# EAGLE board 549-teletouch-sensor (EAGLE 8.0.0)
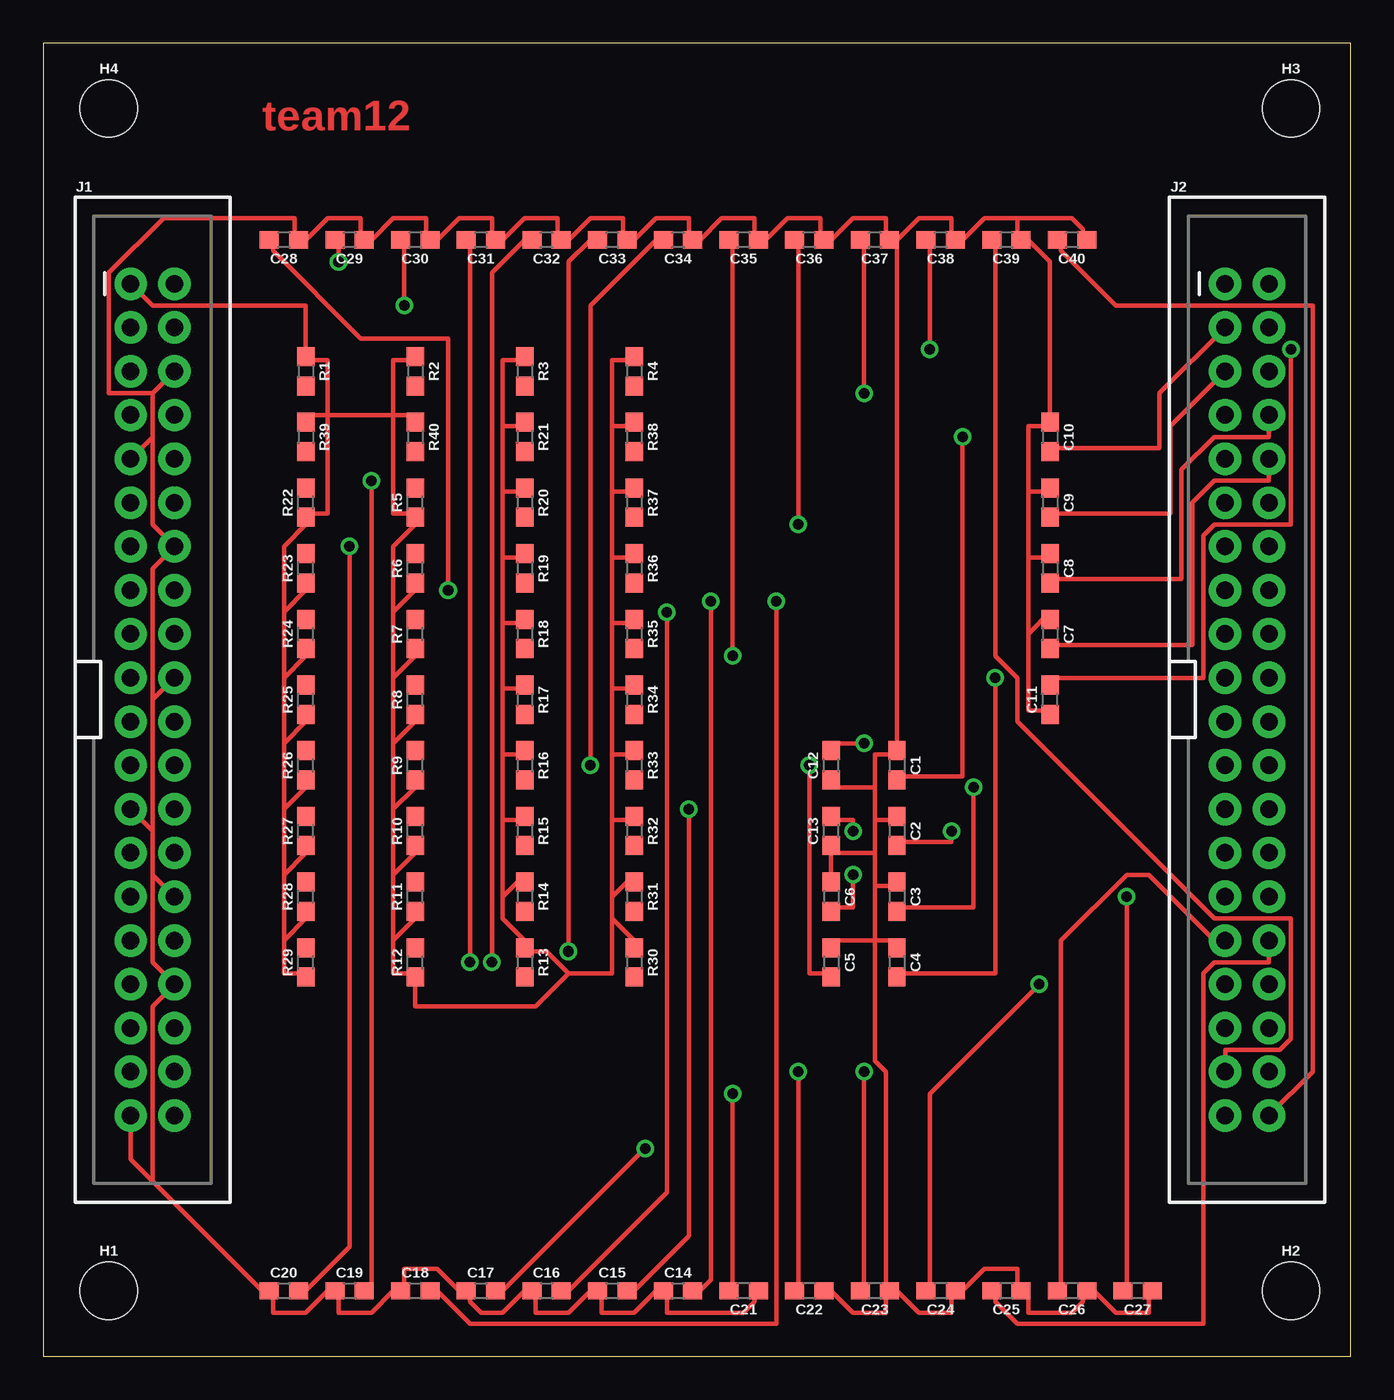
[diagram p0: board, top side]
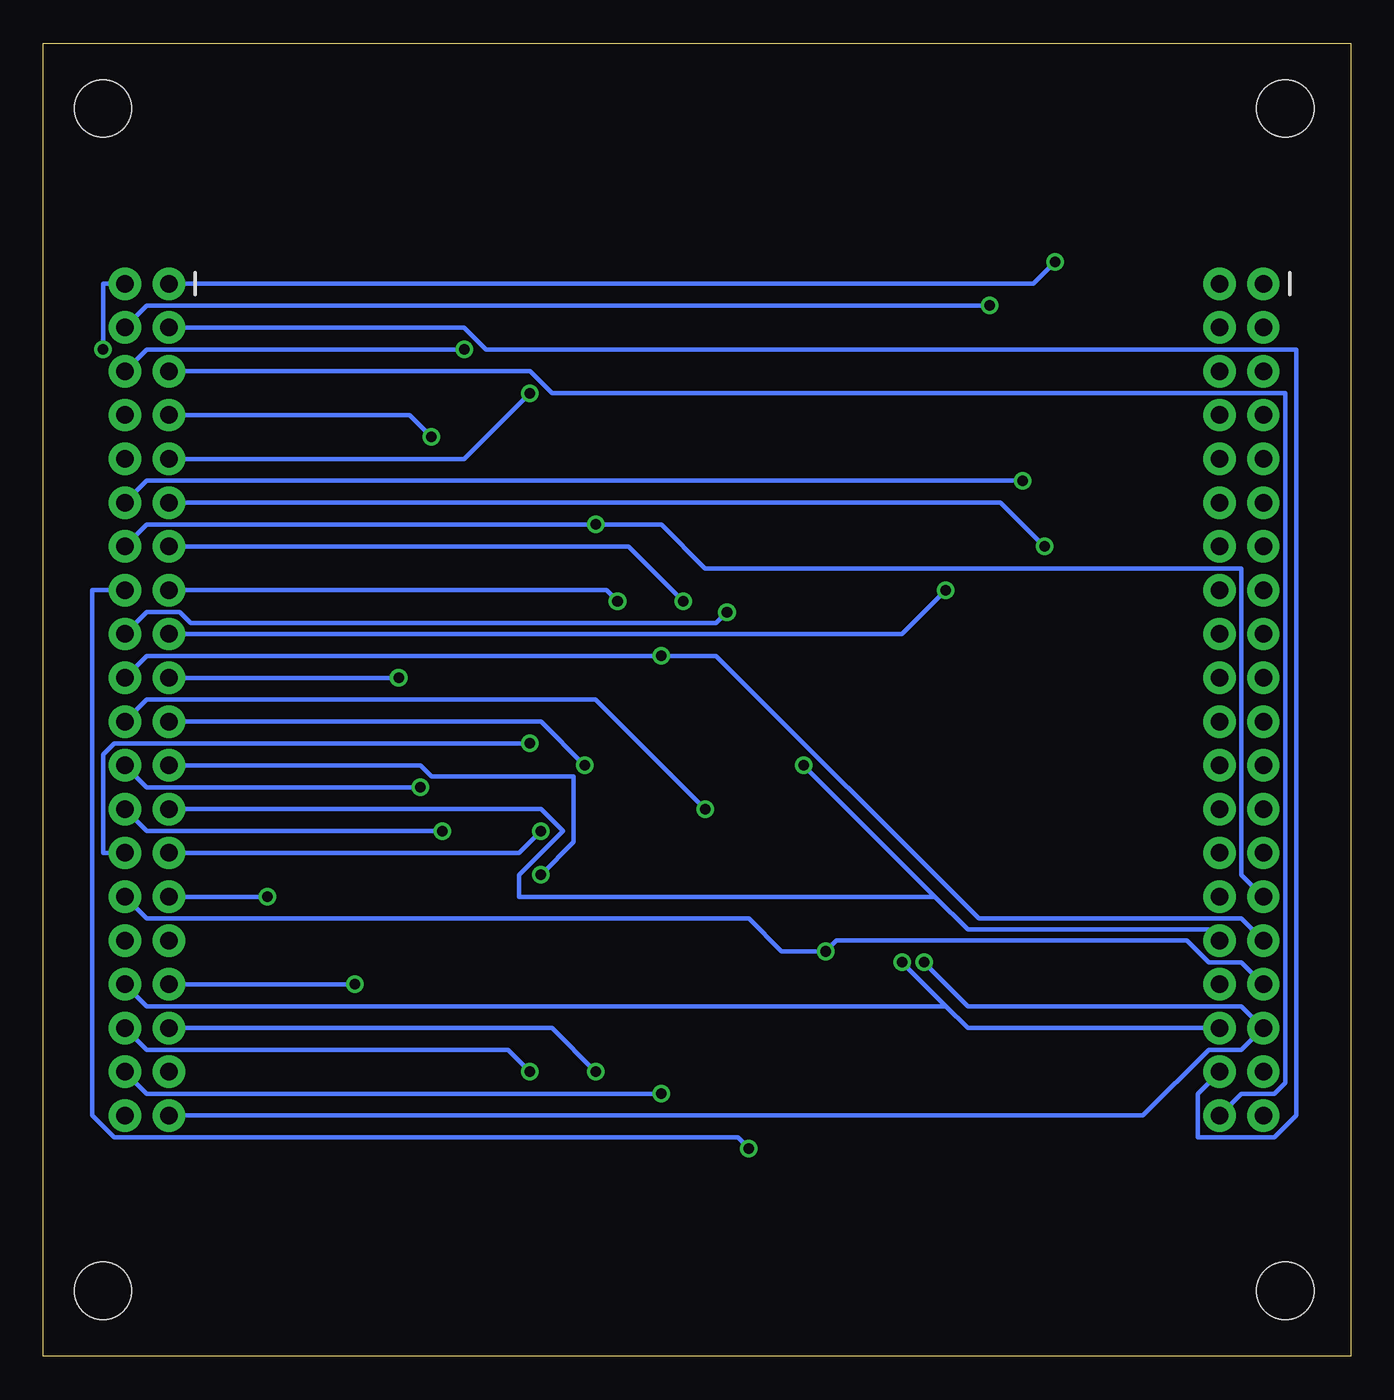
[diagram p1: board, bottom side, seen from below]

Size 75.87 x 76.19 mm. Coordinates in mm from the lower left corner, seen from the top.
Outline: 0,0 75.87,0 75.87,76.19 0,76.19 0,0
Copper layers (1*16): Top 0.035mm / dielectric 1.5mm / Bottom 0.035mm
Design rules "default": minimum track width 10mil, minimum drill 24mil, track to track 8mil, track to pad 8mil, pad to pad 8mil, via to via 8mil, smd to smd 8mil, copper to edge 40mil, drill to drill 8mil, minimum pad ring 10mil, minimum via ring 8mil, stop-mask expansion 4mil, vias tented up to drill 0mil, thermal gap 10mil

## Footprints (pad centres in the part's own frame; a part is rotated, then mirrored left to right if it is on the bottom)
0603 = smd 1.1 x 1: 1 -0.85,0; 2 0.85,0
STAND-OFF = hole 3.302: 0,0
2X20_SHROUDED = drill 1.016 pad 1.88: 1 -1.27,24.13; 2 1.27,24.13; 3 -1.27,21.59; 4 1.27,21.59; 5 -1.27,19.05; 6 1.27,19.05; 7 -1.27,16.51; 8 1.27,16.51; 9 -1.27,13.97; 10 1.27,13.97; 11 -1.27,11.43; 12 1.27,11.43; 13 -1.27,8.89; 14 1.27,8.89; 15 -1.27,6.35; 16 1.27,6.35; 17 -1.27,3.81; 18 1.27,3.81; 19 -1.27,1.27; 20 1.27,1.27; 21 -1.27,-1.27; 22 1.27,-1.27; 23 -1.27,-3.81; 24 1.27,-3.81; 25 -1.27,-6.35; 26 1.27,-6.35; 27 -1.27,-8.89; 28 1.27,-8.89; 29 -1.27,-11.43; 30 1.27,-11.43; 31 -1.27,-13.97; 32 1.27,-13.97; 33 -1.27,-16.51; 34 1.27,-16.51; 35 -1.27,-19.05; 36 1.27,-19.05; 37 -1.27,-21.59; 38 1.27,-21.59; 39 -1.27,-24.13; 40 1.27,-24.13

## Placement (x,y rotation side)
C1  47nF  [0603]  49.53,34.29 270 top
C2  47nF  [0603]  49.53,30.48 270 top
C3  47nF  [0603]  49.53,26.67 270 top
C4  47nF  [0603]  49.53,22.86 270 top
C5  47nF  [0603]  45.72,22.86 270 top
C6  47nF  [0603]  45.72,26.67 270 top
C7  47nF  [0603]  58.42,41.91 270 top
C8  47nF  [0603]  58.42,45.72 270 top
C9  47nF  [0603]  58.42,49.53 270 top
C10  47nF  [0603]  58.42,53.34 270 top
C11  47nF  [0603]  58.42,38.1 90 top
C12  47nF  [0603]  45.72,34.29 90 top
C13  47nF  [0603]  45.72,30.48 90 top
C14  47nF  [0603]  36.83,3.81 0 top
C15  47nF  [0603]  33.02,3.81 0 top
C16  47nF  [0603]  29.21,3.81 0 top
C17  47nF  [0603]  25.4,3.81 0 top
C18  47nF  [0603]  21.59,3.81 0 top
C19  47nF  [0603]  17.78,3.81 0 top
C20  47nF  [0603]  13.97,3.81 0 top
C21  47nF  [0603]  40.64,3.81 180 top
C22  47nF  [0603]  44.45,3.81 180 top
C23  47nF  [0603]  48.26,3.81 180 top
C24  47nF  [0603]  52.07,3.81 180 top
C25  47nF  [0603]  55.88,3.81 180 top
C26  47nF  [0603]  59.69,3.81 180 top
C27  47nF  [0603]  63.5,3.81 180 top
C28  47nF  [0603]  13.97,64.77 180 top
C29  47nF  [0603]  17.78,64.77 180 top
C30  47nF  [0603]  21.59,64.77 180 top
C31  47nF  [0603]  25.4,64.77 180 top
C32  47nF  [0603]  29.21,64.77 180 top
C33  47nF  [0603]  33.02,64.77 180 top
C34  47nF  [0603]  36.83,64.77 180 top
C35  47nF  [0603]  40.64,64.77 180 top
C36  47nF  [0603]  44.45,64.77 180 top
C37  47nF  [0603]  48.26,64.77 180 top
C38  47nF  [0603]  52.07,64.77 180 top
C39  47nF  [0603]  55.88,64.77 180 top
C40  47nF  [0603]  59.69,64.77 180 top
FRAME1  FRAME-LETTER  [CREATIVE_COMMONS]  -101.6,63.5 0 top  (outside the outline)
H1  STAND-OFF  [STAND-OFF]  3.81,3.81 0 top
H2  STAND-OFF  [STAND-OFF]  72.39,3.81 0 top
H3  STAND-OFF  [STAND-OFF]  72.39,72.39 0 top
H4  STAND-OFF  [STAND-OFF]  3.81,72.39 0 top
J1  RASPBERRYPI-40-PIN-GPIO_PTH  [2X20_SHROUDED]  6.35,38.1 0 top
J2  RASPBERRYPI-40-PIN-GPIO_PTH  [2X20_SHROUDED]  69.85,38.1 0 top
R1  2.2k  [0603]  15.24,57.15 270 top
R2  2.2k  [0603]  21.59,57.15 270 top
R3  2.2k  [0603]  27.94,57.15 270 top
R4  2.2k  [0603]  34.29,57.15 270 top
R5  2.2k  [0603]  21.59,49.53 90 top
R6  2.2k  [0603]  21.59,45.72 90 top
R7  2.2k  [0603]  21.59,41.91 90 top
R8  2.2k  [0603]  21.59,38.1 90 top
R9  2.2k  [0603]  21.59,34.29 90 top
R10  2.2k  [0603]  21.59,30.48 90 top
R11  2.2k  [0603]  21.59,26.67 90 top
R12  2.2k  [0603]  21.59,22.86 90 top
R13  2.2k  [0603]  27.94,22.86 270 top
R14  2.2k  [0603]  27.94,26.67 270 top
R15  2.2k  [0603]  27.94,30.48 270 top
R16  2.2k  [0603]  27.94,34.29 270 top
R17  2.2k  [0603]  27.94,38.1 270 top
R18  2.2k  [0603]  27.94,41.91 270 top
R19  2.2k  [0603]  27.94,45.72 270 top
R20  2.2k  [0603]  27.94,49.53 270 top
R21  2.2k  [0603]  27.94,53.34 270 top
R22  2.2k  [0603]  15.24,49.53 90 top
R23  2.2k  [0603]  15.24,45.72 90 top
R24  2.2k  [0603]  15.24,41.91 90 top
R25  2.2k  [0603]  15.24,38.1 90 top
R26  2.2k  [0603]  15.24,34.29 90 top
R27  2.2k  [0603]  15.24,30.48 90 top
R28  2.2k  [0603]  15.24,26.67 90 top
R29  2.2k  [0603]  15.24,22.86 90 top
R30  2.2k  [0603]  34.29,22.86 270 top
R31  2.2k  [0603]  34.29,26.67 270 top
R32  2.2k  [0603]  34.29,30.48 270 top
R33  2.2k  [0603]  34.29,34.29 270 top
R34  2.2k  [0603]  34.29,38.1 270 top
R35  2.2k  [0603]  34.29,41.91 270 top
R36  2.2k  [0603]  34.29,45.72 270 top
R37  2.2k  [0603]  34.29,49.53 270 top
R38  2.2k  [0603]  34.29,53.34 270 top
R39  2.2k  [0603]  15.24,53.34 270 top
R40  2.2k  [0603]  21.59,53.34 270 top

## Library data of the parts
C1-C40 = SparkFun-Capacitors; PROD_ID: CAP-08605
FRAME1 = SparkFun-Aesthetics
H1-H4 = SparkFun-Hardware
J1 J2 = SparkFun-Connectors; PROD_ID: CONN-12263; SF_ID: PRT-13054
R1-R40 = SparkFun-Resistors; PROD_ID: RES-08272

## Nets
3.3V: J1.17
5V: J1.4
GND: C1.1 C2.1 C3.1 C4.1 C5.1 C6.1 C7.1 C8.1 C9.1 C10.1 C11.1 C12.1 C13.1 C14.1 C15.1 C16.1 C17.1 C18.1 C19.1 C20.1 C21.1 C22.1 C23.1 C24.1 C25.1 C26.1 C27.1 C28.1 C29.1 C30.1 C31.1 C32.1 C33.1 C34.1 C35.1 C36.1 C37.1 C38.1 C39.1 C40.1 J1.6 J1.9 J1.14 J1.20 J1.25 J1.30 J1.34 J1.39
GP1: C8.2 J2.8
GP2: C7.2 J2.10
GP3: C6.2 J2.23
GP4: C5.2 J2.21
GP5: C4.2 J2.19
GP6: C3.2 J2.24
GP7: C2.2 J2.26
GP8: C1.2 J2.7
GP9: C20.2 J2.11
GP10: C19.2 J2.12
GP11: C18.2 J2.15
GP12: C17.2 J2.16
GP13: C16.2 J2.18
GP14: C15.2 J2.22
GP15: C14.2 J2.13
GP16: C13.2 J2.27
GP17: C12.2 J2.28
GP18: C11.2 J2.2
GP19: C30.2 J2.4
GP20: C29.2 J2.1
GP21: C28.2 J2.17
GP22: C27.2 J2.29
GP23: C26.2 J2.31
GP24: C25.2 J2.32
GP25: C24.2 J2.33
GP26: C23.2 J2.36
GP27: C22.2 J2.35
GP28: C21.2 J2.38
GP29: C40.2 J2.40
GP30: C39.2 J2.37
GP31: C38.2 J2.6
GP32: C37.2 J2.9
GP33: C36.2 J1.29 J2.14
GP34: C35.2 J1.31 J2.20
GP35: C34.2 J1.32 J2.25
GP36: C33.2 J1.33 J2.30
GP37: C32.2 J1.36 J2.34
GP38: C31.2 J1.35 J2.39
GP39: C10.2 J1.38 J2.3
GP40: C9.2 J1.40 J2.5
GP41: J1.37
GP42: J1.7
GP43: J1.11
GP44: J1.12
GP45: J1.15
GP46: J1.16
GP47: J1.18
GP48: J1.22
GP49: J1.13
N$11: R10.2
N$12: R1.2
N$13: R2.2
N$14: R3.2
N$15: R4.2
N$16: R5.2
N$17: R6.2
N$18: R7.2
N$19: R8.2
N$20: R9.2
N$31: R20.2
N$32: R11.2
N$33: R12.2
N$34: R13.2
N$35: R14.2
N$36: R15.2
N$37: R16.2
N$38: R17.2
N$39: R18.2
N$40: R19.2
N$51: R30.2
N$52: R21.2
N$53: R22.2
N$54: R23.2
N$55: R24.2
N$56: R25.2
N$57: R26.2
N$58: R27.2
N$59: R28.2
N$60: R29.2
N$71: R40.2
N$72: R31.2
N$73: R32.2
N$74: R33.2
N$75: R34.2
N$76: R35.2
N$77: R36.2
N$78: R37.2
N$79: R38.2
N$80: R39.2
SCL: J1.5
SDA: J1.3
VCC: J1.1 R1.1 R2.1 R3.1 R4.1 R5.1 R6.1 R7.1 R8.1 R9.1 R10.1 R11.1 R12.1 R13.1 R14.1 R15.1 R16.1 R17.1 R18.1 R19.1 R20.1 R21.1 R22.1 R23.1 R24.1 R25.1 R26.1 R27.1 R28.1 R29.1 R30.1 R31.1 R32.1 R33.1 R34.1 R35.1 R36.1 R37.1 R38.1 R39.1 R40.1
VDD: J1.2

## Tracks (layer width: path | path; a pad name or v marks a point on that pad's centre or on a via)
GND
  Top 0.254: 6.35,53.34 J1.9 | 6.35,55.88 6.35,53.34 | J1.6 6.35,55.88 | 6.35,53.34 6.35,48.26 J1.14 6.35,45.72 6.35,38.1 | 6.35,30.48 J1.25 | 6.35,27.94 6.35,30.48 | J1.30 6.35,27.94 | 6.35,27.94 6.35,22.86 J1.34 6.35,20.32 6.35,10.16 | 6.35,38.1 J1.20 | 6.35,30.48 6.35,38.1 | 6.35,10.16 5.08,11.43 J1.39 | 6.35,10.16 12.7,3.81 C20.1 13.34,3.81 13.34,2.54 15.24,2.54 16.51,3.81 C19.1 17.14,3.81 17.14,2.54 19.05,2.54 20.32,3.81 C18.1 20.95,3.81 20.95,5.08 22.86,5.08 24.13,3.81 C17.1 24.77,3.81 24.77,3.17 25.4,2.54 26.67,2.54 27.94,3.81 C16.1 28.57,3.81 28.57,2.54 30.48,2.54 31.75,3.81 C15.1 32.38,3.81 32.38,2.54 34.29,2.54 35.56,3.81 C14.1 36.2,3.81 36.2,2.54 40.64,2.54 41.27,3.17 41.27,3.81 C21.1 | 45.72,29.21 C6.1 | 48.26,24.13 49.53,24.13 C4.1 | 48.26,24.13 45.72,24.13 C5.1 | 48.26,27.3 49.53,27.3 C3.1 | 48.26,24.13 48.26,27.3 | 48.26,31.11 49.53,31.11 C2.1 | 48.26,27.3 48.26,29.21 | 48.26,29.21 48.26,31.11 | 48.26,33.02 45.72,33.02 C12.1 | 48.26,31.11 48.26,33.02 | 48.26,33.02 48.26,34.92 49.53,34.92 C1.1 49.53,64.77 | 48.26,29.21 45.72,29.21 | 45.72,29.21 C13.1 | C27.1 64.14,3.81 64.14,2.54 62.23,2.54 60.96,3.81 C26.1 60.33,3.81 60.33,3.17 59.69,2.54 57.15,2.54 57.15,3.81 C25.1 56.52,3.81 56.52,5.08 54.61,5.08 53.34,3.81 C24.1 52.7,3.81 52.7,2.54 50.8,2.54 49.53,3.81 C23.1 48.9,3.81 | 48.9,3.81 48.9,2.54 46.99,2.54 45.72,3.81 C22.1 | 48.26,24.13 48.26,17.14 48.9,16.51 48.9,3.81 | 56.52,66.04 54.61,66.04 53.34,64.77 C38.1 52.7,64.77 52.7,66.04 50.8,66.04 49.53,64.77 | 56.52,66.04 56.52,64.77 C39.1 57.15,64.77 58.42,63.5 C10.1 58.42,53.98 57.15,53.98 57.15,50.16 | 56.52,66.04 59.69,66.04 60.33,65.41 60.33,64.77 C40.1
  Top 0.254: 57.15,41.91 57.15,37.47 58.42,37.47 C11.1 | 57.15,41.91 58.42,43.18 C7.1 | 57.15,46.35 58.42,46.35 C8.1 | 57.15,41.91 57.15,46.35 | 57.15,50.16 58.42,50.16 C9.1 | 57.15,46.35 57.15,50.16 | 49.53,64.77 C37.1 48.9,64.77 48.9,66.04 46.99,66.04 45.72,64.77 C36.1 45.09,64.77 45.09,66.04 43.18,66.04 41.91,64.77 C35.1 41.27,64.77 41.27,66.04 39.37,66.04 38.1,64.77 C34.1 37.47,64.77 37.47,66.04 35.56,66.04 34.29,64.77 C33.1 33.66,64.77 33.66,66.04 31.75,66.04 30.48,64.77 C32.1 29.84,64.77 29.84,66.04 27.94,66.04 26.67,64.77 C31.1 26.04,64.77 26.04,66.04 24.13,66.04 22.86,64.77 C30.1 22.23,64.77 22.23,66.04 20.32,66.04 19.05,64.77 C29.1 18.41,64.77 18.41,66.04 16.51,66.04 15.24,64.77 C28.1 14.61,64.77 14.61,66.04 6.99,66.04 3.81,62.87 3.81,55.88 6.35,55.88
GP1
  Top 0.254: J2.8 71.12,53.34 67.94,53.34 66.04,51.44 66.04,45.09 58.42,45.09 C8.2
GP2
  Top 0.254: J2.10 71.12,50.8 67.94,50.8 66.67,49.53 66.67,41.27 58.42,41.27 C7.2
GP3  (via drill 0.61)
  Top 0.254: v46.99,27.94 46.99,26.04 45.72,26.04 C6.2
  Bottom 0.254: v46.99,27.94 45.09,29.84 45.09,33.66 53.34,33.66 53.98,34.29 J2.23
GP4  (via drill 0.61)
  Top 0.254: v44.45,34.29 44.45,22.23 45.72,22.23 C5.2
  Bottom 0.254: v44.45,34.29 46.99,36.83 J2.21
GP5  (via drill 0.61)
  Top 0.254: v55.24,39.37 55.24,22.23 49.53,22.23 C4.2
  Bottom 0.254: J2.19 v55.24,39.37
GP6  (via drill 0.61)
  Top 0.254: v53.98,33.02 53.98,26.04 49.53,26.04 C3.2
  Bottom 0.254: v53.98,33.02 69.85,33.02 J2.24
GP7  (via drill 0.61)
  Top 0.254: v52.7,30.48 52.7,29.84 49.53,29.84 C2.2
  Bottom 0.254: v52.7,30.48 69.85,30.48 J2.26
GP8  (via drill 0.61)
  Top 0.254: v53.34,53.34 53.34,33.66 49.53,33.66 C1.2
  Bottom 0.254: v53.34,53.34 54.61,54.61 J2.7
GP9  (via drill 0.61)
  Top 0.254: v17.78,46.99 17.78,6.35 15.24,3.81 C20.2
  Bottom 0.254: v17.78,46.99 20.32,49.53 J2.11
GP10  (via drill 0.61)
  Top 0.254: v19.05,50.8 19.05,3.81 C19.2
  Bottom 0.254: v19.05,50.8 69.85,50.8 J2.12
GP11  (via drill 0.61)
  Top 0.254: v42.55,43.81 42.55,1.91 24.77,1.91 22.86,3.81 C18.2
  Bottom 0.254: v42.55,43.81 43.18,44.45 J2.15
GP12  (via drill 0.61)
  Top 0.254: v34.92,12.06 26.67,3.81 C17.2
  Bottom 0.254: v34.92,12.06 35.56,12.7 71.75,12.7 73.03,13.97 73.03,44.45 J2.16
GP13  (via drill 0.61)
  Top 0.254: v36.2,43.18 36.2,9.53 30.48,3.81 C16.2
  Bottom 0.254: v36.2,43.18 36.83,42.55 67.31,42.55 67.94,43.18 69.85,43.18 J2.18
GP14  (via drill 0.61)
  Top 0.254: v37.47,31.75 37.47,6.99 34.29,3.81 C15.2
  Bottom 0.254: v37.47,31.75 43.81,38.1 69.85,38.1 J2.22
GP15  (via drill 0.61)
  Top 0.254: v38.73,43.81 38.73,4.45 38.1,3.81 C14.2
  Bottom 0.254: v38.73,43.81 41.91,46.99 J2.13
GP16  (via drill 0.61)
  Top 0.254: v46.99,30.48 46.99,31.11 45.72,31.11 C13.2
  Bottom 0.254: v46.99,30.48 48.26,29.21 J2.27
GP17  (via drill 0.61)
  Top 0.254: v47.62,35.56 45.72,35.56 C12.2
  Bottom 0.254: v47.62,35.56 71.75,35.56 72.39,34.92 72.39,29.21 J2.28
GP18  (via drill 0.61)
  Top 0.254: v72.39,58.42 72.39,48.26 67.94,48.26 67.31,47.62 67.31,39.37 58.42,39.37 C11.2
  Bottom 0.254: v72.39,58.42 72.39,62.23 J2.2
GP19  (via drill 0.61)
  Top 0.254: v20.95,60.96 20.95,64.77 C30.2
  Bottom 0.254: v20.95,60.96 69.85,60.96 J2.4
GP20  (via drill 0.61)
  Top 0.254: v17.14,63.5 17.14,64.77 C29.2
  Bottom 0.254: v17.14,63.5 18.41,62.23 J2.1
GP21  (via drill 0.61)
  Top 0.254: v23.5,44.45 23.5,59.05 18.41,59.05 13.34,64.14 13.34,64.77 C28.2
  Bottom 0.254: v23.5,44.45 26.04,41.91 J2.17
GP22  (via drill 0.61)
  Top 0.254: v62.87,26.67 62.87,3.81 C27.2
  Bottom 0.254: J2.29 v62.87,26.67
GP23
  Top 0.254: J2.31 67.94,24.13 64.14,27.94 62.87,27.94 59.05,24.13 59.05,3.81 C26.2
GP24
  Top 0.254: J2.32 71.12,22.86 67.94,22.86 67.31,22.23 67.31,1.91 56.52,1.91 55.24,3.17 55.24,3.81 C25.2
GP25  (via drill 0.61)
  Top 0.254: v57.78,21.59 51.44,15.24 51.44,3.81 C24.2
  Bottom 0.254: J2.33 v57.78,21.59
GP26  (via drill 0.61)
  Top 0.254: v47.62,16.51 47.62,3.81 C23.2
  Bottom 0.254: v47.62,16.51 48.9,17.78 69.85,17.78 J2.36
GP27  (via drill 0.61)
  Top 0.254: v43.81,16.51 43.81,3.81 C22.2
  Bottom 0.254: v43.81,16.51 46.35,19.05 J2.35
GP28  (via drill 0.61)
  Top 0.254: v40.01,15.24 40.01,3.81 C21.2
  Bottom 0.254: v40.01,15.24 69.85,15.24 J2.38
GP29
  Top 0.254: J2.40 73.66,16.51 73.66,60.96 62.23,60.96 59.05,64.14 59.05,64.77 C40.2
GP30
  Top 0.254: J2.37 68.58,17.78 71.75,17.78 72.39,18.41 72.39,25.4 67.94,25.4 56.52,36.83 56.52,39.37 55.24,40.64 55.24,64.77 C39.2
GP31  (via drill 0.61)
  Top 0.254: v51.44,58.42 51.44,64.77 C38.2
  Bottom 0.254: v51.44,58.42 69.85,58.42 J2.6
GP32  (via drill 0.61)
  Top 0.254: v47.62,55.88 47.62,64.77 C37.2
  Bottom 0.254: v47.62,55.88 51.44,52.07 J2.9
GP33  (via drill 0.61)
  Top 0.254: v43.81,48.26 43.81,64.77 C36.2
  Bottom 0.254: J2.14 69.85,48.26 v43.81,48.26 40.01,48.26 37.47,45.72 6.35,45.72 6.35,27.94 J1.29
GP34  (via drill 0.61)
  Top 0.254: v40.01,40.64 40.01,64.77 C35.2
  Bottom 0.254: J2.20 69.85,40.64 v40.01,40.64 36.83,40.64 21.59,25.4 6.35,25.4 J1.31
GP35  (via drill 0.61)
  Top 0.254: v31.75,34.29 31.75,60.96 35.56,64.77 C34.2
  Bottom 0.254: 24.13,26.67 22.23,24.77 8.26,24.77 J1.32 | 24.13,26.67 v31.75,34.29 | J2.25 46.99,31.75 45.72,30.48 48.26,27.94 48.26,26.67 24.13,26.67
GP36  (via drill 0.61)
  Top 0.254: v30.48,23.5 30.48,63.5 31.75,64.77 C33.2
  Bottom 0.254: J1.33 6.35,22.86 8.26,22.86 9.53,24.13 29.84,24.13 v30.48,23.5 33.02,23.5 34.92,25.4 69.85,25.4 J2.30
GP37  (via drill 0.61)
  Top 0.254: v26.04,22.86 26.04,62.87 27.94,64.77 C32.2
  Bottom 0.254: 23.5,20.32 22.23,19.05 J1.36 | 23.5,20.32 v26.04,22.86 | J2.34 69.85,20.32 23.5,20.32
GP38  (via drill 0.61)
  Top 0.254: v24.77,22.86 24.77,64.77 C31.2
  Bottom 0.254: v24.77,22.86 22.23,20.32 6.35,20.32 J1.35 6.35,17.78 8.26,17.78 12.06,13.97 J2.39
GP39
  Top 0.254: J2.3 64.77,55.88 64.77,52.7 58.42,52.7 C10.2
  Bottom 0.254: J1.38 8.89,15.24 8.89,12.7 4.45,12.7 3.17,13.97 3.17,58.42 50.16,58.42 51.44,59.69 J2.3
GP40
  Top 0.254: J2.5 65.41,53.98 65.41,48.9 58.42,48.9 C9.2
  Bottom 0.254: J1.40 6.35,15.24 4.45,15.24 3.81,15.88 3.81,55.88 46.35,55.88 47.62,57.15 J2.5
VCC
  Top 0.254: 26.67,26.67 26.67,25.4 27.94,24.13 R13.1 27.94,23.5 29.21,23.5 30.48,22.23 | 26.67,26.67 27.94,27.94 R14.1 | 26.67,31.11 27.94,31.11 R15.1 | 26.67,26.67 26.67,31.11 | 26.67,34.92 27.94,34.92 R16.1 | 26.67,31.11 26.67,34.92 | 26.67,38.73 27.94,38.73 R17.1 | 26.67,34.92 26.67,38.73 | 26.67,42.55 27.94,42.55 R18.1 | 26.67,38.73 26.67,42.55 | 26.67,46.35 27.94,46.35 R19.1 | 26.67,42.55 26.67,46.35 | 26.67,50.16 27.94,50.16 R20.1 | 26.67,46.35 26.67,50.16 | 26.67,53.98 27.94,53.98 R21.1 | 26.67,50.16 26.67,53.98 | 26.67,53.98 26.67,57.78 27.94,57.78 R3.1 | 33.02,25.4 34.29,24.13 R30.1 | 33.02,26.67 33.02,25.4 | 33.02,26.67 34.29,27.94 R31.1 | 33.02,31.11 34.29,31.11 R32.1 | 33.02,26.67 33.02,31.11 | 33.02,34.92 34.29,34.92 R33.1 | 33.02,31.11 33.02,34.92 | 33.02,38.73 34.29,38.73 R34.1 | 33.02,34.92 33.02,38.73 | 33.02,42.55 34.29,42.55 R35.1 | 33.02,38.73 33.02,42.55 | 33.02,46.35 34.29,46.35 R36.1 | 33.02,42.55 33.02,46.35 | 33.02,50.16 34.29,50.16 R37.1 | 33.02,46.35 33.02,50.16 | 33.02,53.98 34.29,53.98 R38.1 | 33.02,50.16 33.02,53.98 | 33.02,53.98 33.02,57.78 34.29,57.78 R4.1 | 30.48,22.23 33.02,22.23 33.02,25.4 | 20.32,24.13 20.32,22.23 21.59,22.23 R12.1 21.59,20.32 28.57,20.32 30.48,22.23 | 20.32,24.13 21.59,25.4 R11.1 | 20.32,27.94 21.59,29.21 R10.1 | 20.32,24.13 20.32,27.94 | 20.32,31.75 21.59,33.02 R9.1 | 20.32,27.94 20.32,31.75 | 20.32,35.56 21.59,36.83 R8.1 | 20.32,31.75 20.32,35.56 | 20.32,39.37 21.59,40.64 R7.1 | 20.32,35.56 20.32,39.37 | 20.32,43.18 21.59,44.45 R6.1 | 20.32,39.37 20.32,43.18 | 20.32,43.18 20.32,46.99 21.59,48.26 R5.1 21.59,48.9 20.32,48.9 20.32,54.61 | 13.97,24.13 13.97,22.23 15.24,22.23 R29.1 | 13.97,24.13 15.24,25.4 R28.1
  Top 0.254: 13.97,27.94 15.24,29.21 R27.1 | 13.97,24.13 13.97,27.94 | 13.97,31.75 15.24,33.02 R26.1 | 13.97,27.94 13.97,31.75 | 13.97,35.56 15.24,36.83 R25.1 | 13.97,31.75 13.97,35.56 | 13.97,39.37 15.24,40.64 R24.1 | 13.97,35.56 13.97,39.37 | 13.97,43.18 15.24,44.45 R23.1 | 13.97,39.37 13.97,43.18 | 13.97,43.18 13.97,46.99 15.24,48.26 R22.1 15.24,48.9 16.51,48.9 16.51,54.61 | 20.32,54.61 21.59,54.61 R40.1 | 20.32,54.61 16.51,54.61 | 16.51,54.61 15.24,54.61 R39.1 | 16.51,54.61 16.51,57.78 15.24,57.78 R1.1 15.24,60.96 6.35,60.96 J1.1 | 20.32,54.61 20.32,57.78 21.59,57.78 R2.1

## Text on the board
Top: team12